# Altium PCB eBox_Led.PcbDoc
Units mm, origin at the board's own origin, x right, y up, seen from the top; angles counter-clockwise.
Board outline 100 x 22 mm, 2 copper layers (Top, Bottom), stack 1.57 mm thick; 56 components, 59 nets, 182 pads, 95 vias.
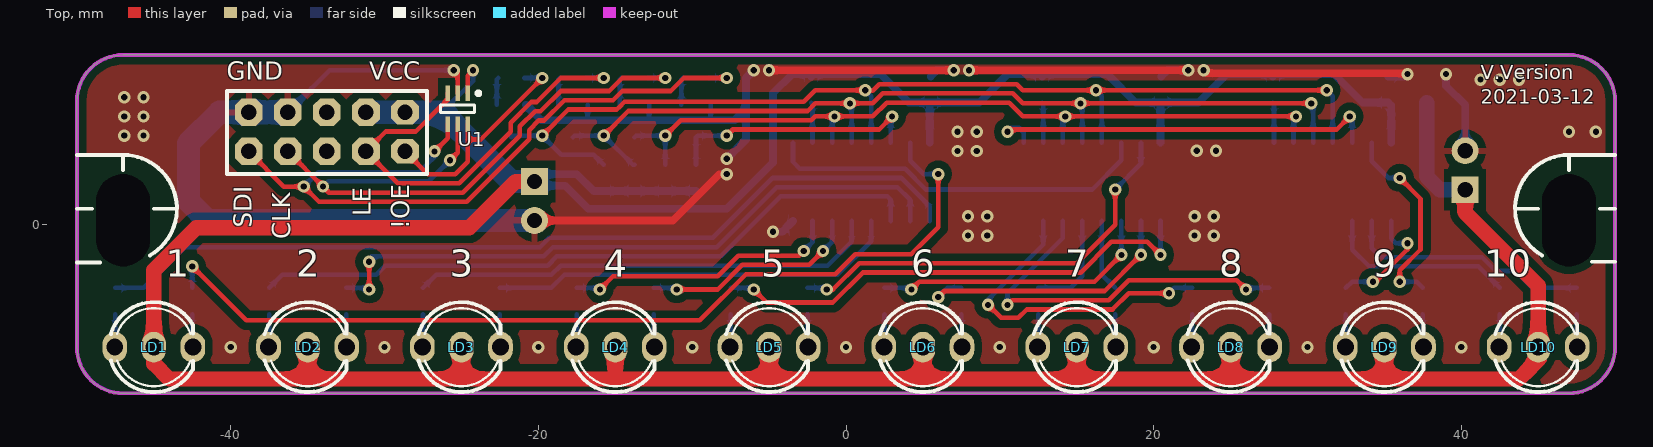
[diagram p0: Top view]
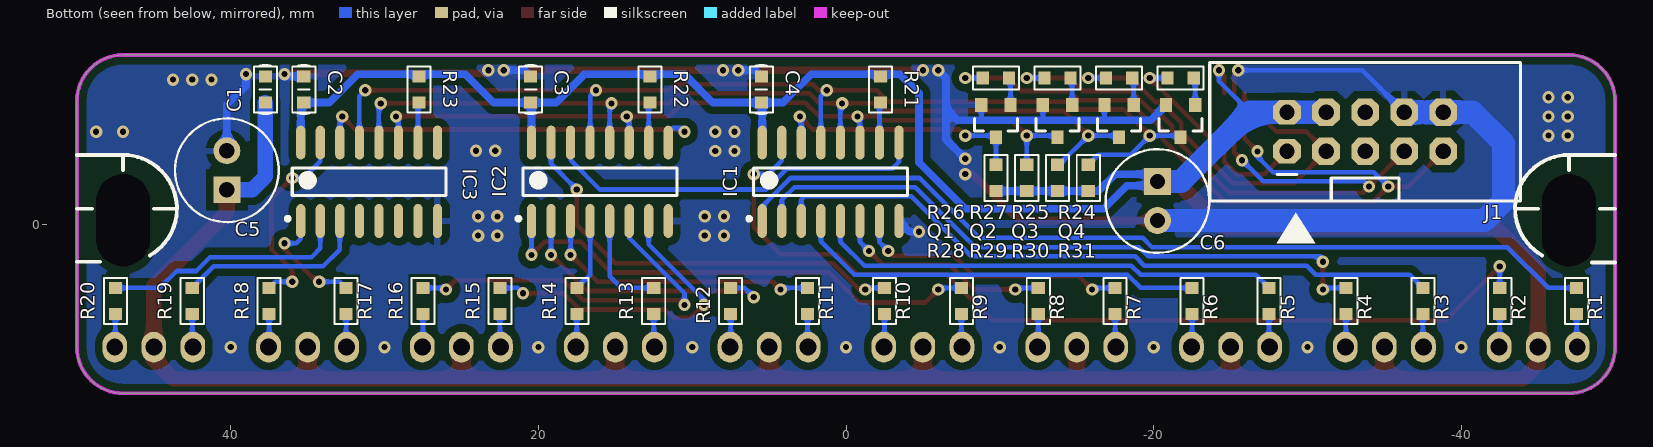
[diagram p1: Bottom view, seen from below]
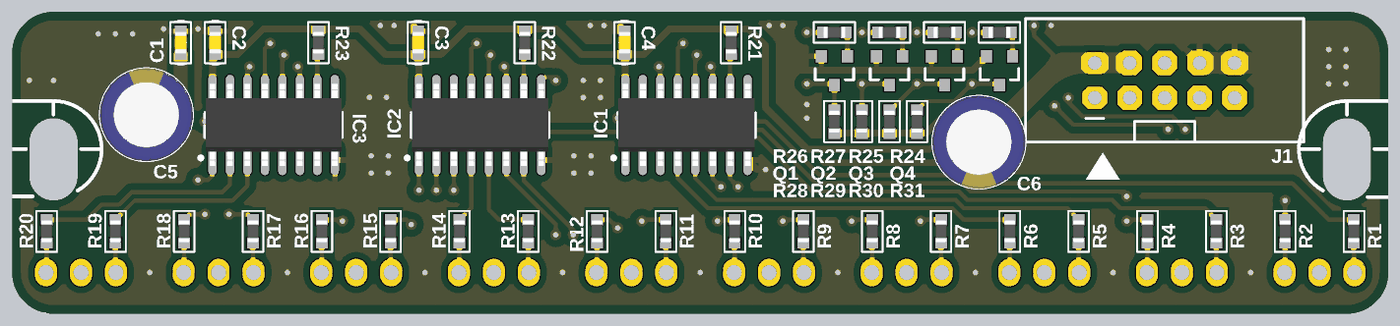
[diagram p2: 3D render of the assembled board from below, using the file's embedded part models]

## Layer stack, top to bottom
Top Solder: solder mask 0.0102, Solder Resist, Dk 3.5
Top: signal copper 0.035
Dielectric 1: core 1.5, FR-4, Dk 4.8
Bottom: signal copper 0.035
Bottom Solder: solder mask 0.0102, Solder Resist, Dk 3.5

## Board outline
-47,-11 cw(c-47,-8) -50,-8 -50,8 cw(c-47,8) -47,11 47,11 cw(c47,8) 50,8 50,-8 cw(c47,-8) 47,-11

## Design rules (kind name [scope] priority, off if disabled: settings)
Clearance Clearance_1 [InPolygon] p1: gap=0.5 ignorepadtopadclearanceinfootprint=FALSE except(0: Arc-Hole Track-Hole SMDPad-Hole THPad-Hole Via-Hole Fill-Hole Poly-Hole Region-Hole Text-Hole)
Clearance [All] p2: gap=0.3 ignorepadtopadclearanceinfootprint=FALSE except(0: Arc-Hole Track-Hole SMDPad-Hole THPad-Hole Via-Hole Fill-Hole Poly-Hole Region-Hole Text-Hole)
PolygonConnect PolygonConnect_1 [IsVia] p1: connectstyle=Direct reliefconductorwidth=0.254 reliefentries=4 polygonreliefangle="90 Angle" airgapwidth=0.254
PolygonConnect [All] p2: connectstyle=Relief reliefconductorwidth=0.4 reliefentries=4 polygonreliefangle="90 Angle" airgapwidth=0.5
RoutingVias [All] p1: holewidth=1.524 width=2.54 viastyle="Through Hole" minholewidth=0.4 minwidth=0.8 maxholewidth=0.711 maxwidth=1.27
SolderMaskExpansion [All] p1: expansion=0.102
Width [All] p1: maxlimit=5.08 minlimit=0.203 preferedwidth=0.305
30 further rules are at their usual default settings.

## Components (designator, comment, footprint, x,y, rotation, side; value= is the part's Value field where it differs from the comment)
C1 "100nF" "C 0603" 37.75,8.75 r90 bottom
C2 "100nF" "C 0603" 35.25,8.75 r90 bottom
C3 "100nF" "C 0603" 20.5,8.75 r90 bottom
C4 "100nF" "C 0603" 5.5,8.75 r90 bottom
C5 "CAP_POL3528-KIT" CYL/D.250/LS.100 40.25,3.5 r90 bottom
C6 "CAP_POL3528-KIT" CYL/D.250/LS.100 -20.25,1.5 r270 bottom
IC1 "74*595D" SOIC-16 1,2.75 r90 bottom
IC2 "74*595D" SOIC-16 16,2.75 r90 bottom
IC3 "74*595D" SOIC-16 31,2.75 r90 bottom
J1 "M05X2SHD" 2X5-SHROUDED -33.75,6 r90 bottom locked
LD1 "DUOLED-RG-A" DUOLED-A-5MM -45,-8 r0 top locked
LD2 "DUOLED-RG-A" DUOLED-A-5MM -35,-8 r0 top locked
LD3 "DUOLED-RG-A" DUOLED-A-5MM -25,-8 r0 top locked
LD4 "DUOLED-RG-A" DUOLED-A-5MM -15,-8 r0 top locked
LD5 "DUOLED-RG-A" DUOLED-A-5MM -5,-8 r0 top locked
LD6 "DUOLED-RG-A" DUOLED-A-5MM 5,-8 r0 top locked
LD7 "DUOLED-RG-A" DUOLED-A-5MM 15,-8 r0 top locked
LD8 "DUOLED-RG-A" DUOLED-A-5MM 25,-8 r0 top locked
LD9 "DUOLED-RG-A" DUOLED-A-5MM 35,-8 r0 top locked
LD10 "DUOLED-RG-A" DUOLED-A-5MM 45,-8 r0 top locked
Q1 "TRANSISTOR_NPNSOT23-3" SOT23-3 -9.75,6.75 r0 bottom
Q2 "TRANSISTOR_NPNSOT23-3" SOT23-3 -13.75,6.75 r0 bottom
Q3 "TRANSISTOR_NPNSOT23-3" SOT23-3 -17.75,6.75 r0 bottom
Q4 "TRANSISTOR_NPNSOT23-3" SOT23-3 -21.75,6.75 r0 bottom
R1 "330" "R 0603" -47.5,-5 r90 bottom
R2 "470" "R 0603" -42.5,-5 r90 bottom
R3 "330" "R 0603" -37.5,-5 r90 bottom
R4 "470" "R 0603" -32.5,-5 r90 bottom
R5 "330" "R 0603" -27.5,-5 r90 bottom
R6 "470" "R 0603" -22.5,-5 r90 bottom
R7 "330" "R 0603" -17.5,-5 r90 bottom
R8 "470" "R 0603" -12.5,-5 r90 bottom
R9 "330" "R 0603" -7.5,-5 r90 bottom
R10 "470" "R 0603" -2.5,-5 r90 bottom
R11 "330" "R 0603" 2.5,-5 r90 bottom
R12 "470" "R 0603" 7.5,-5 r90 bottom
R13 "330" "R 0603" 12.5,-5 r90 bottom
R14 "470" "R 0603" 17.5,-5 r90 bottom
R15 "330" "R 0603" 22.5,-5 r90 bottom
R16 "470" "R 0603" 27.5,-5 r90 bottom
R17 "330" "R 0603" 32.5,-5 r90 bottom
R18 "470" "R 0603" 37.5,-5 r90 bottom
R19 "330" "R 0603" 42.5,-5 r90 bottom
R20 "470" "R 0603" 47.5,-5 r90 bottom
R21 "10k" "R 0603" -2.25,8.75 r90 bottom
R22 "10k" "R 0603" 12.75,8.75 r90 bottom
R23 "10k" "R 0603" 27.75,8.75 r90 bottom
R24 "10k" "R 0603" -21.75,9.5 r180 bottom
R25 "10k" "R 0603" -17.75,9.5 r180 bottom
R26 "10k" "R 0603" -13.75,9.5 r180 bottom
R27 "10k" "R 0603" -9.75,9.5 r180 bottom
R28 "10k" "R 0603" -9.75,3 r270 bottom
R29 "10k" "R 0603" -11.75,3 r270 bottom
R30 "10k" "R 0603" -13.75,3 r270 bottom
R31 "10k" "R 0603" -15.75,3 r270 bottom
U1 "SMF05C" SOT-363-6 -25.25,7.5 r270 top

## Footprints (in the part's own frame and the unit in brackets; to place one, negate y for a bottom-side part, rotate by r counter-clockwise, add the part's x,y. Pads: shape width x height; smd on the part's side, far side on the other; paste and mask are expansions set on the pad)
2X5-SHROUDED [mm] "2X5-SHROUDED"
  oct 1.6x1.8 hole 1: 1(-1.27,5.08) 2(1.27,5.08)
  oct 1.8x1.8 hole 1: 3(-1.27,2.54) 4(1.27,2.54) 5(-1.27,0) 6(1.27,0) 7(-1.27,-2.54) 8(1.27,-2.54) 9(-1.27,-5.08) 10(1.27,-5.08)
  silkscreen extent -4.5,-10.1 4.5,10.1
"C 0603" [mm] "Chip Capacitor, 2-Leads, Body 1.6x0.8mm, IPC Medium Density"
  rect 0.8x0.85 smd: 1(-0.85,0) 2(0.85,0)
  silkscreen extent -1.6,-0.75 1.6,0.75, body extent -0.8,-0.43 0.8,0.43, height 0.81
CYL/D.250/LS.100 [mm]
  rect 1.75x1.75 hole 1: 1(-1.27,0)
  round 1.75 hole 1: 2(1.27,0)
  silkscreen extent -3.37,-3.37 3.37,3.37, body extent -3.4,-3.4 3.4,3.4, height 12.5
DUOLED-A-5MM [mm] "DUOLED-A-5MM"
  oval 1.6x2 hole 1.1: A(0,0) CR(2.54,0) CX(-2.54,0)
  silkscreen extent -2.79,-2.92 2.54,2.92
"R 0603" [mm] "Chip Resistor, 2-Leads, Body 1.6x0.8mm, IPC Medium Density"
  rect 0.8x0.85 smd: 1(-0.85,0) 2(0.85,0)
  silkscreen extent -1.5,-0.75 1.5,0.75, body extent -0.8,-0.4 0.8,0.4, height 0.5
SOIC-16 [mm] "SOIC, 16-Leads, Body 10.0x4.0mm (max), Pitch 1.27mm, IPC Medium Density"
  oval 2.2x0.6 smd: 1(-2.55,4.445) 2(-2.55,3.175) 3(-2.55,1.905) 4(-2.55,0.635) 5(-2.55,-0.635) 6(-2.55,-1.905) 7(-2.55,-3.175) 8(-2.55,-4.445) 9(2.55,-4.445) 10(2.55,-3.175) 11(2.55,-1.905) 12(2.55,-0.635) 13(2.55,0.635) 14(2.55,1.905) 15(2.55,3.175) 16(2.55,4.445)
  silkscreen extent -2.52,-5 0.9,5.42, body extent -3,-4.95 3,4.95, height 1.4
SOT23-3 [mil] "SOT23-3"
  rect 31.5x35.43 smd: 1(-37.4,-39.37) 2(37.4,-39.37) 3(0,43.31)
  silkscreen extent -55,-4 55,28
SOT-363-6 [mm] "SOT363 (SC-88, SC-70-6), 6-Leads, Body 2.2x2.2mm (max), Pitch 0.65mm, IPC Medium Density"
  rect 1x0.3 smd: 1(-1,0.65) 2(-1,0) 3(-1,-0.65) 4(1,-0.65) 5(1,0) 6(1,0.65)
  silkscreen extent -1.12,-1.1 0.25,1.48, body extent -1.15,-1.05 1.15,1.05, height 1

## Part data
C1 C2 C3 C4: library part CAP0603-CAP, "CapacitorStandard 0603 ceramic capacitor, and 0.1\" leaded capacitor."
C5 C6: "Capacitor PolarizedThese are standard SMD and PTH capacitors. Normally 10uF, 47uF, and 100uF in electrolytic and tantalum varieties. Always verify the external diameter of the through hole cap, it varies with capacity, voltage, and manufacturer. The EIA devices should be standard."
IC1 IC2 IC3: "8-bit SHIFT REGISTER, output latch"
J1: "Header 5x2Standard 10-pin dual row 0.1\" header. Commonly used with AVR-ISP. Use with Spark Fun Electronics SKU: PRT-00778"
LD1 LD2 LD3 LD4 LD5 LD6 LD7 LD8 LD9 LD10: "DUO LED   2 colors (red/green), 5 mm, round, common Anode www.ligitek.com or other producers."
Q1 Q2 Q3 Q4: "Generic NPN BJT   MMBT2222A - TRANS-08049 (SOT-23, 1A 40V) MPSA42 - TRANS-09116 (SOT-23, 500mA 300V) MMBT5088LT1G - TRANS-11160 (SOT-23, 50 mA 30V)          BC547 -     COM-08928    (TO-92 45V 100mA) (1.Collector 2.Base 3.Emitter)             2N3904 -     COM-00521    (TO-92 40V 200mA) (1.Emitter 2.Base 3.Collector)             P2N2222A -     COM-12852    (TO-92 40V 600mA) (1.Collector 2.Base 3.Emitter)", PROD_ID=TRANS-08049
R1 R2 R3 R4 R5 R6 R7 R8 R9 R10 R11 R12 R13 R14 R15 R16 R17 R18 R19 R20 R21 R22 R23 R24 R25 R26 R27 R28 R29 R30 R31: library part R-EU_R0603, "RESISTOR, European symbol"
U1: "5-Line Transient Voltage Suppressor Array"

## Free pads (board coordinates)
  round 0 hole 3.5 slot 6 at 90 deg unplated: 1(-47,0.25) 1(47,0.25)

## Via types
v1: diameter 0.8, hole 0.4, Top to Bottom, tented both sides, 95 vias

## Nets (pads, with @x,y where several pads share a name; then routed paths per layer and width w, separated by ;. In a path a pad name is that pad's centre, name@x,y a point inside that pad or via, vN(x,y) a via of type N, cw(c..) or ccw(c..) an arc to the next point about the centre after c; other vN are vias at no path point)
CLK: IC1.11 IC2.11 IC3.11 Q2.3 R29.1 | length 51.5
  Top w0.3: v1(-11.75,5.75) -10.75,6.75 -2.25,6.75 -2,7 v1(-0.75,7) 1.749,7 2.649,7.9 10.601,7.9 11.501,7 v1(14.25,7) v1(29.25,7)
  Bottom w0.3: Q2.3 -13.65,5.75 v1(-11.75,5.75) R29.1 ; IC1.11 -0.905,6.845 v1(-0.75,7) ; IC2.11 14.095,6.845 v1(14.25,7) ; IC3.11 29.095,6.845 v1(29.25,7)
G1: IC1.1 R1.2 | length 57.6
  Bottom w0.3: R1.2 -45.65,-4.15 -43,-1.5 -19.894,-1.5 -19.294,-0.9 -8.65,-0.9 -4.75,3 3.599,3 5.445,1.154 IC1.1
G2: IC1.3 R3.2 | length 44.3
  Bottom w0.3: R3.2 -36.65,-3.3 -30.55,-3.3 -29.95,-2.7 -19.397,-2.7 -18.797,-2.1 -8.153,-2.1 -4.253,1.8 2.7,1.8 2.905,1.595 IC1.3
G3: IC1.5 R5.2 | length 30.4
  Bottom w0.3: R5.2 -26.65,-3.3 -19.149,-3.3 -18.549,-2.7 -1.2,-2.7 0.365,-1.135 IC1.5
G4: IC1.7 R7.2 | length 18
  Top w0.3: v1(-16,-4.25) -15.15,-3.4 -8.347,-3.4 -6.997,-2.05 -3.05,-2.05 v1(-2.75,-1.75)
  Bottom w0.3: R7.2 -16.1,-4.15 v1(-16,-4.25) ; v1(-2.75,-1.75) -2.175,-1.175 IC1.7
G5: IC2.1 R9.2 | length 32.5
  Top w0.3: v1(-6,-4.25) -5.15,-5.1 -0.85,-5.1 1.1,-3.15 15.25,-3.15 17.25,-1.15 19.595,-1.15 v1(20.445,-2)
  Bottom w0.3: R9.2 -6.1,-4.15 v1(-6,-4.25) ; v1@20.445,-1.945 IC2.1
G6: IC2.3 R11.2 | length 18.6
  Top w0.3: v1(4.25,-4.25) 4.75,-3.75 16.155,-3.75 v1(17.905,-2)
  Bottom w0.3: R11.2 4.15,-4.15 v1(4.25,-4.25) ; v1(17.905,-2) IC2.3
G7: IC2.5 R13.2 | length 6.8
  Bottom w0.3: R13.2 14.6,-4.15 15.365,-3.385 IC2.5
G8: IC2.7 R15.2 | length 21.4
  Top w0.3: v1(9.23,-5.25) 10.08,-6.1 11.2,-6.1 11.75,-5.55 17.322,-5.55 18.372,-4.5 v1(21,-4.5)
  Bottom w0.3: v1(9.23,-5.25) 9.23,-4.921 12.825,-1.326 IC2.7 ; v1(21,-4.5) 21.35,-4.15 R15.2
G9: IC3.1 R17.2 | length 7.8
  Top w0.3: v1(34.25,-3.75) 34.401,-3.75 36.5,-1.651 v1(36.5,-1.25)
  Bottom w0.3: R17.2 32.9,-3.75 v1(34.25,-3.75) ; IC3.1 35.445,-0.945 35.75,-1.25 v1(36.5,-1.25)
G10: IC3.3 R19.2 | length 12.5
  Bottom w0.3: IC3.3 32.905,-1.655 34,-2.75 41.1,-2.75 R19.2
GND: C1.2 C2.2 C3.2 C4.2 C5.2 C6.2 IC1.8 IC2.8 IC3.8 J1.8 J1.10 Q1.2 Q2.2 Q3.2 Q4.2 U1.2 | length 137.6
  Top w0.3: v1(-25.5,10) -25.25,9.75 U1.2
  Top w0.5: C6.2 -11.27,0.23 -8.25,3.25 v1(-7.75,3.25) ; v1(-5,10) v1(7,10) ; v1(8,10) v1(22.25,10) ; v1(23.25,10) 23.45,9.8 v1@36.454,9.8
  Bottom w0.3: J1.8 -33.56,10 v1(-25.5,10) ; Q3.2 -16.8,6.8 -16.75,6.75 ; Q2.2 -12.8,6.8 -12.75,6.75 ; Q1.2 -8.8,6.8 -8.75,6.75
  Bottom w0.5: Q4.2 -19.8,6.75 -16.75,6.75 -12.75,6.75 -8.75,6.75 -7.25,6.75 -6.5,7.5 ; v1(-7.75,4.25) -6.5,5.5 -6.5,7.5 ; v1(-6,10) -6.5,9.5 -6.5,7.5 ; v1(-4.75,-0.5) -4.145,-0.5 IC1.8 ; C4.2 5.9,10 v1(7,10) ; C3.2 20.9,10 v1(22.25,10) ; C2.2 36.35,9.6 v1(36.5,9.75) ; v1@39,9.918 39,9 40.25,7.75 C5.2
  Bottom w1.5: J1.8 J1.10 -40.73,7.27 -42.75,5.25 -42.75,1.5 -41.48,0.23 C6.2
  other v1: -40,-8 -30,-8 -20,-8 -10,-8 0,-8 10,-8 20,-8 30,-8 40,-8 7.935,-0.75 9.185,-0.75 22.664,-0.75 23.914,-0.75 7.935,0.5 9.185,0.5 22.664,0.5 23.914,0.5 7.25,4.75 8.5,4.75 22.798,4.77 24.048,4.77 -46.923,5.75 -45.673,5.75 7.25,6 8.5,6 47,6 48.75,6 -46.923,7 -45.673,7 -46.923,8.25 -45.673,8.25 41.25,9.393 42.5,9.393 43.75,9.393 39,9.75
I_!OE: J1.1 R24.1 U1.6 | length 15.1
  Top w0.3: J1.1 -27.19,3.25 -25.4,3.25 -24.6,4.05 -24.6,5.5 ; U1.6 -24.6,5.5 ; v1(-19.75,9.5) -23.75,5.5 -24.6,5.5
  Bottom w0.3: R24.1 v1(-19.75,9.5)
I_CLK: J1.7 R26.1 U1.5 | length 41.8
  Top w0.3: J1.7 v1(-34,2.44) -33.61,2.05 -24.903,2.05 -21.2,5.753 -21.2,6.351 -20.213,7.338 -19.859,7.338 -18.55,8.647 -18.55,8.649 ; v1(-25.75,4.146) -25.25,4.646 U1.5 ; -18.549,8.65 -15.398,8.65 -14.548,9.5 v1(-11.75,9.5)
  Bottom w0.3: v1(-34,2.44) -33.66,2.78 -27.116,2.78 v1(-25.75,4.146) ; R26.1 v1(-11.75,9.5)
I_LE: J1.3 R25.1 U1.3 | length 27.8
  Top w0.3: U1.3 -25.9,8.1 -26.5,7.5 -26.504,7.5 -27.984,6.02 -29.92,6.02 J1.3 -29.13,2.65 -25.151,2.65 -21.8,6.001 -21.8,6.599 -20.461,7.938 -20.11,7.938 -18.548,9.5 v1(-15.75,9.5)
  Bottom w0.3: R25.1 v1(-15.75,9.5)
I_SDI: J1.9 R27.1 U1.4 | length 49
  Top w0.3: J1.9 -36.54,2.44 v1(-35.25,2.44) -34.26,1.45 -24.654,1.45 -20.6,5.504 -20.6,6.102 -19.964,6.738 -19.611,6.738 -18.299,8.05 -15.149,8.05 -14.549,8.65 -11.398,8.65 -10.548,9.5 v1(-7.75,9.5) ; v1(-26.75,4.73) -25.9,5.58 U1.4
  Bottom w0.3: v1(-35.25,2.44) -34.31,3.38 -27.757,3.38 -26.75,4.387 v1(-26.75,4.73) ; R27.1 v1(-7.75,9.5)
LE: IC1.12 IC2.12 IC3.12 Q3.3 R30.1 | length 60
  Top w0.3: v1(-15.75,5.75) -14.15,7.35 -2.499,7.35 -1.999,7.85 v1(0.25,7.85) 1.75,7.85 2.4,8.5 10.85,8.5 11.5,7.85 v1(15.25,7.85) v1(30.25,7.85)
  Bottom w0.3: Q3.3 -17.65,5.75 v1(-15.75,5.75) -13.85,3.85 R30.1 ; v1(0.25,7.85) 0.365,7.735 IC1.12 ; v1(15.25,7.85) 15.365,7.735 IC2.12 ; v1(30.25,7.85) 30.365,7.735 IC3.12
NetIC1_9: IC1.9 IC2.14 | length 25.3
  Bottom w0.3: IC1.9 -3.445,4.045 -3,3.6 3.847,3.6 5.197,2.25 16,2.25 17.905,4.155 IC2.14
NetIC1_10: IC1.10 R21.1 | length 2.6
  Bottom w0.3: R21.1 -2.175,7.825 IC1.10
NetIC2_9: IC2.9 IC3.14 | length 26.4
  Top w0.3: v1(10.5,6) 10.65,6.15 31.9,6.15 v1(32.75,7)
  Bottom w0.3: v1(10.5,6) 10.75,6.25 11.25,6.25 11.555,5.945 IC2.9 ; v1(32.75,7) 32.905,6.845 IC3.14
NetIC2_10: IC2.10 R22.1 | length 2.6
  Bottom w0.3: R22.1 12.825,7.825 IC2.10
NetIC3_10: IC3.10 R23.1 | length 2.6
  Bottom w0.3: R23.1 27.825,7.825 IC3.10
NetLD1_CR: LD1.CR R2.1 | length 2.2
  Bottom w0.3: R2.1 -42.5,-7.96 LD1.CR
NetLD1_CX: LD1.CX R1.1 | length 2.2
  Bottom w0.3: LD1.CX -47.5,-7.96 R1.1
NetLD2_CR: LD2.CR R4.1 | length 2.1
  Bottom w0.3: LD2.CR@-32.5,-7.96 R4.1
NetLD2_CX: LD2.CX R3.1 | length 2.1
  Bottom w0.3: LD2.CX@-37.5,-7.96 R3.1
NetLD3_CR: LD3.CR R6.1 | length 2.1
  Bottom w0.3: LD3.CR@-22.5,-7.96 R6.1
NetLD3_CX: LD3.CX R5.1 | length 2.1
  Bottom w0.3: LD3.CX@-27.5,-7.96 R5.1
NetLD4_CR: LD4.CR R8.1 | length 2.1
  Bottom w0.3: LD4.CR@-12.5,-7.96 R8.1
NetLD4_CX: LD4.CX R7.1 | length 2.1
  Bottom w0.3: LD4.CX@-17.5,-7.96 R7.1
NetLD5_CR: LD5.CR R10.1 | length 2.1
  Bottom w0.3: LD5.CR@-2.5,-7.96 R10.1
NetLD5_CX: LD5.CX R9.1 | length 2.1
  Bottom w0.3: LD5.CX@-7.5,-7.96 R9.1
NetLD6_CR: LD6.CR R12.1 | length 2.1
  Bottom w0.3: LD6.CR@7.5,-7.96 R12.1
NetLD6_CX: LD6.CX R11.1 | length 2.1
  Bottom w0.3: LD6.CX@2.5,-7.96 R11.1
NetLD7_CR: LD7.CR R14.1 | length 2.1
  Bottom w0.3: LD7.CR@17.5,-7.96 R14.1
NetLD7_CX: LD7.CX R13.1 | length 2.1
  Bottom w0.3: LD7.CX@12.5,-7.96 R13.1
NetLD8_CR: LD8.CR R16.1 | length 2.1
  Bottom w0.3: LD8.CR@27.5,-7.96 R16.1
NetLD8_CX: LD8.CX R15.1 | length 2.1
  Bottom w0.3: LD8.CX@22.5,-7.96 R15.1
NetLD9_CR: LD9.CR R18.1 | length 2.1
  Bottom w0.3: LD9.CR@37.5,-7.96 R18.1
NetLD9_CX: LD9.CX R17.1 | length 2.1
  Bottom w0.3: LD9.CX@32.5,-7.96 R17.1
NetLD10_CR: LD10.CR R20.1 | length 2.1
  Bottom w0.3: LD10.CR@47.5,-7.96 R20.1
NetLD10_CX: LD10.CX R19.1 | length 2.1
  Bottom w0.3: LD10.CX@42.5,-7.96 R19.1
NetQ1_1: Q1.1 R27.2 | length 1.8
  Bottom w0.3: Q1.1 -10.7,9.4 R27.2
NetQ2_1: Q2.1 R26.2 | length 1.8
  Bottom w0.3: Q2.1 -14.7,9.4 R26.2
NetQ3_1: Q3.1 R25.2 | length 1.8
  Bottom w0.3: Q3.1 -18.7,9.4 R25.2
NetQ4_1: Q4.1 R24.2 | length 1.8
  Bottom w0.3: Q4.1 -22.7,9.4 R24.2
O\E\: IC1.13 IC2.13 IC3.13 Q4.3 R31.1 | length 70.1
  Top w0.3: v1(-19.75,5.75) -18.05,7.45 -14.901,7.45 -14.75,7.601 -14.748,7.601 -14.399,7.95 -2.747,7.95 -1.997,8.7 v1(1.25,8.7) 1.276,8.674 1.726,8.674 2.151,9.1 11.099,9.1 11.499,8.7 v1(16.25,8.7) v1(31.25,8.7)
  Bottom w0.3: Q4.3 -21.65,5.75 v1(-19.75,5.75) -18.5,4.5 -16.4,4.5 R31.1 ; v1(1.25,8.7) 1.635,8.315 IC1.13 ; v1(16.25,8.7) 16.635,8.315 IC2.13 ; v1(31.25,8.7) 31.635,8.315 IC3.13
R1: IC1.15 R2.2 | length 60.7
  Top w0.3: v1(-42.5,-2.75) -39,-6.25 -9.5,-6.25 -6.5,-3.25 -0.697,-3.25 0.603,-1.95 4.25,-1.95 6,-0.2 v1(6,3.25)
  Bottom w0.3: R2.2 v1(-42.5,-2.75) ; IC1.15 4.175,4.121 5.046,3.25 v1(6,3.25)
R2: IC1.2 R4.2 | length 42.2
  Top w0.3: v1(-31,-4.25) v1(-31,-2.45)
  Bottom w0.3: R4.2 -31.1,-4.15 v1(-31,-4.25) ; v1@-31,-2.25 -30.85,-2.1 -19.646,-2.1 -19.046,-1.5 -8.401,-1.5 -4.501,2.4 3.35,2.4 4.175,1.575 IC1.2
R3: IC1.4 R6.2 | length 26.7
  Bottom w0.3: R6.2 -19.15,-4.15 -18.3,-3.3 -0.55,-3.3 1.635,-1.115 IC1.4
R4: IC1.6 R8.2 | length 14.3
  Top w0.3: v1(-11,-4.25) -8.349,-4.25 -6.749,-2.65 -2.4,-2.65 v1(-1.5,-1.75)
  Bottom w0.3: R8.2 -11.1,-4.15 v1(-11,-4.25) ; v1(-1.5,-1.75) -0.905,-1.155 IC1.6
R5: IC2.15 R10.2 | length 27.8
  Top w0.3: v1(-1.25,-4.25) -0.849,-4.25 0.851,-2.55 15.001,-2.55 17.5,-0.051 v1(17.5,2.25)
  Bottom w0.3: R10.2 -1.35,-4.15 v1(-1.25,-4.25) ; v1(17.5,2.25) 19.175,3.925 IC2.15
R6: IC2.2 R12.2 | length 18.2
  Top w0.3: v1(6,-4.75) 6.4,-4.35 16.825,-4.35 v1(19.175,-2)
  Bottom w0.3: v1(6,-4.75) 6.6,-4.15 R12.2 ; v1@19.175,-1.925 IC2.2
R7: IC2.4 R14.2 | length 4.7
  Bottom w0.3: IC2.4 16.635,-3.285 R14.2
R8: IC2.6 R16.2 | length 24.9
  Top w0.3: v1(10.5,-5.25) 10.8,-4.95 17.074,-4.95 18.374,-3.65 25.4,-3.65 v1(26,-4.25)
  Bottom w0.3: v1(10.5,-5.25) 10.5,-4.5 14.095,-0.905 IC2.6 ; v1(26,-4.25) 26.1,-4.15 R16.2
R9: IC3.15 R18.2 | length 13
  Top w0.3: v1(36,-3.75) 36,-3 37.35,-1.65 37.35,1.65 v1(36,3)
  Bottom w0.3: IC3.15 34.175,4.075 35.25,3 v1(36,3) ; v1(36,-3.75) 37.1,-3.75 R18.2
R10: IC3.2 R20.2 | length 16.2
  Bottom w0.3: IC3.2 34.175,-1.575 34.75,-2.15 41.349,-2.15 42.248,-3.05 43.5,-3.05 44.6,-4.15 R20.2
SDI: IC1.14 Q1.3 R28.1 | length 16.8
  Top w0.3: v1(-7.75,5.75) -7.35,6.15 2.15,6.15 v1(3,7)
  Bottom w0.3: R28.1 Q1.3 -9.65,5.75 v1(-7.75,5.75) ; IC1.14 2.905,6.905 v1(3,7)
VCC: C1.1 C2.1 C3.1 C4.1 C5.1 C6.1 IC1.16 IC2.16 IC3.16 J1.2 J1.4 LD1.A LD2.A LD3.A LD4.A LD5.A LD6.A LD7.A LD8.A LD9.A LD10.A R21.2 R22.2 R23.2 R28.2 R29.2 R30.2 R31.2 U1.1 | length 265.4
  Top w0.3: U1.1 -24.6,9.65 v1(-24.25,10)
  Top w1: LD2.A -35,-10.073 ; LD3.A -25,-10.073 ; C6.1 -21.48,2.77 -24.5,-0.25 -42.25,-0.25 -45,-3 LD1.A -45,-9.073 -44,-10.073 -35,-10.073 ; LD4.A -15,-9.823 -15.25,-10.073 ; LD5.A -5,-10.073 ; LD6.A 5,-10.073 ; LD7.A 15,-10.073 ; LD8.A 25,-10.073 ; LD9.A 35,-10.073 ; C5.1 40.25,0.75 45,-4 LD10.A 45,-8.823 43.75,-10.073 35,-10.073 ; -35,-10.073 -25,-10.073 ; -25,-10.073 -15.25,-10.073 ; -15.25,-10.073 -5,-10.073 ; -5,-10.073 5,-10.073 ; 5,-10.073 15,-10.073 ; 15,-10.073 25,-10.073 ; 25,-10.073 35,-10.073
  Bottom w0.3: -26.27,7.27 -24.25,9.29 v1(-24.25,10)
  Bottom w0.5: R28.2 R29.2 R30.2 R31.2 -16.4,2.15 -17.5,3.25 -19.77,3.25 C6.1 -19.98,2.5 -18.25,2.5 -16.75,1 -7.75,1 -4.75,4 -4.75,8.5 -3.5,9.75 R21.2@-2.1,9.75 ; R21.2 R21.2@-2.1,9.75 ; IC1.16 5.445,7.845 C4.1 ; IC2.16 20.445,7.845 C3.1 ; IC3.16 35.445,7.705 C2.1 33.6,7.9 31.75,9.75 27.9,9.75 R23.2 27.6,9.75 24.75,9.75 22.9,7.9 C3.1 ; R21.2@-2.1,9.75 2.25,9.75 4.1,7.9 C4.1 ; C4.1 8.65,7.9 10.5,9.75 12.6,9.75 R22.2 12.9,9.75 17,9.75 18.85,7.9 C3.1
  Bottom w1: C1.1 37.75,3.091 38.611,2.23 C5.1
  Bottom w1.5: J1.4 J1.2 -26.27,7.27 -21.77,2.77 C6.1
pads on no net: IC3.4 IC3.5 IC3.6 IC3.7 IC3.9 J1.5 J1.6

## Polygon pours and split planes (outlines as drawn)
GND on Top "GND-TOP" (solid, remove dead copper, pour order 4): -50,11 -50,-11 50,-11 50,11
GND on Bottom "GND-BOT" (solid, remove dead copper, pour order 6): -50,11 -50,-11 50,-11 50,11

## Keep-outs
Keep-Out Layer:
  the board outline again, w0.254

## Other copper
Top:
  pour cut-out: -50,4.5 -47,4.5 cw(c-47,1) -43.5,1 cw(c-47,1) -47,-2.5 -50,-2.5
  pour cut-out: 50,-2.5 47,-2.5 cw(c47,1) 43.5,1 cw(c47,1) 47,4.5 50,4.5
Bottom:
  pour cut-out: -50,4.5 -47,4.5 cw(c-47,1) -43.5,1 cw(c-47,1) -47,-2.5 -50,-2.5
  pour cut-out: 50,-2.5 47,-2.5 cw(c47,1) 43.5,1 cw(c47,1) 47,4.5 50,4.5

## Silkscreen, mask and mechanical layers (free items; w line width, h text height)
Top Overlay:
  lines w0.254: -50,-2.5 -48.5,-2.5 ; -50,1 -49,1 ; -50,4.5 -47,4.5 ; -47,3.5 -47,4.5 ; -45.25,-2.031 ccw(c-47,1) -47,4.5 ; -45,1 -43.5,1 ; 43.5,1 45,1 ; 45.25,-2.031 cw(c47,1) 47,4.5 ; 47,3.5 47,4.5 ; 48.5,-2.45 50,-2.45 ; 49,1 50,1 ; 50,4.5 47,4.5 ; -40.25,3.25 -27.25,3.25 -27.25,8.655 -40.25,8.655 -40.25,3.25
  text "GND" at -40.25,9 h2
  text "VCC" at -31,9 h2
  text "V.Version / 2021-03-12" at 41.25,7.5 h1.6
  text "LE" at -30.5,0.5 h2 r90
  text "SDI" at -38.25,-0.25 h2 r90
  text "!OE" at -28,-0.35 h2 r90
  text "CLK" at -35.75,-1 h2 r90
  text "1" at -44.223,-4 h3
  text "2" at -35.75,-4 h3
  text "3" at -25.75,-4 h3
  text "4" at -15.75,-4 h3
  text "5" at -5.5,-4 h3
  text "6" at 4.25,-4 h3
  text "7" at 14.25,-4 h3
  text "8" at 24.25,-4 h3
  text "9" at 34.25,-4 h3
  text "10" at 41.5,-4 h3
Bottom Overlay:
  region: -29.25,0.75 -28,-1.25 -30.5,-1.25
  lines w0.254: -50,-2.5 -48.5,-2.5 ; -50,1 -49,1 ; -50,4.5 -47,4.5 ; -47,3.5 -47,4.5 ; -45.25,-2.031 ccw(c-47,1) -47,4.5 ; -45,1 -43.5,1 ; 43.5,1 45,1 ; 45.25,-2.031 cw(c47,1) 47,4.5 ; 47,3.5 47,4.5 ; 48.5,-2.45 50,-2.45 ; 49,1 50,1 ; 50,4.5 47,4.5
Dimension:
  lines w0.254: -50,-9 ccw(c-47,-9) -47,-12 47,-12 ccw(c47,-9) 50,-9 50,11 ccw(c47,11) 47,14 -47,14 ccw(c-47,11) -50,11 -50,-9
tDocu:
  lines w0.254: -65,-25 -65,25 55,25 55,-25 -65,-25
Mechanical 31:
  circle w0.254: c47,0 r1.6
  circle w0.254: c-47,0 r1.6
  circle w0.254: c45,-8 r2.6
  circle w0.254: c35,-8 r2.6
  circle w0.254: c25,-8 r2.6
  circle w0.254: c15,-8 r2.6
  circle w0.254: c5,-8 r2.6
  circle w0.254: c-5,-8 r2.6
  circle w0.254: c-15,-8 r2.6
  circle w0.254: c-25,-8 r2.6
  circle w0.254: c-35,-8 r2.6
  circle w0.254: c-45,-8 r2.6
  lines w0.254: -50,0 50,0 ; -47,-2.5 -47,2.5 ; -45,-11.75 -45,-4.25 ; -35,-11.75 -35,-4.25 ; -25,-11.75 -25,-4.25 ; -15,-11.75 -15,-4.25 ; -5,-11.75 -5,-4.25 ; 5,-11.75 5,-4.25 ; 15,-11.75 15,-4.25 ; 25,-11.75 25,-4.25 ; 35,-11.75 35,-4.25 ; 45,-11.75 45,-4.25 ; 47,-2.5 47,2.5 ; -50,-8 ccw(c-47,-8) -47,-11 47,-11 ccw(c47,-8) 50,-8 ; -50,-8 50,-8 ; -50,-8 -50,8 cw(c-47,8) -47,11 47,11 cw(c47,8) 50,8 50,-8
Mechanical 32:
  text "(D 3.2mm)" at -43,-1.75 h1
  text "(D 5.2mm)" at -40.25,-5.75 h1

## Dimensions
-47,1 to 47,1 on tDocu
-50,8 to 50,8 on tDocu
-50,8 to -47,1.75 on tDocu
-50,-8 to 50,-8 on tDocu
-45,-11.75 to -35,-11.75 on tDocu
-50,-8 to -45,-11.75 on tDocu
-47,-11 to -47,11 on tDocu
-47,-11 to -50,0 on tDocu
-47,-11 to -50,-8 on tDocu
-45,-8 to -41,-4.75 on tDocu
-47,0 to -44,-2 on tDocu